# EAGLE board 48x_49x Breakout Board RevB (EAGLE 8.3.1)
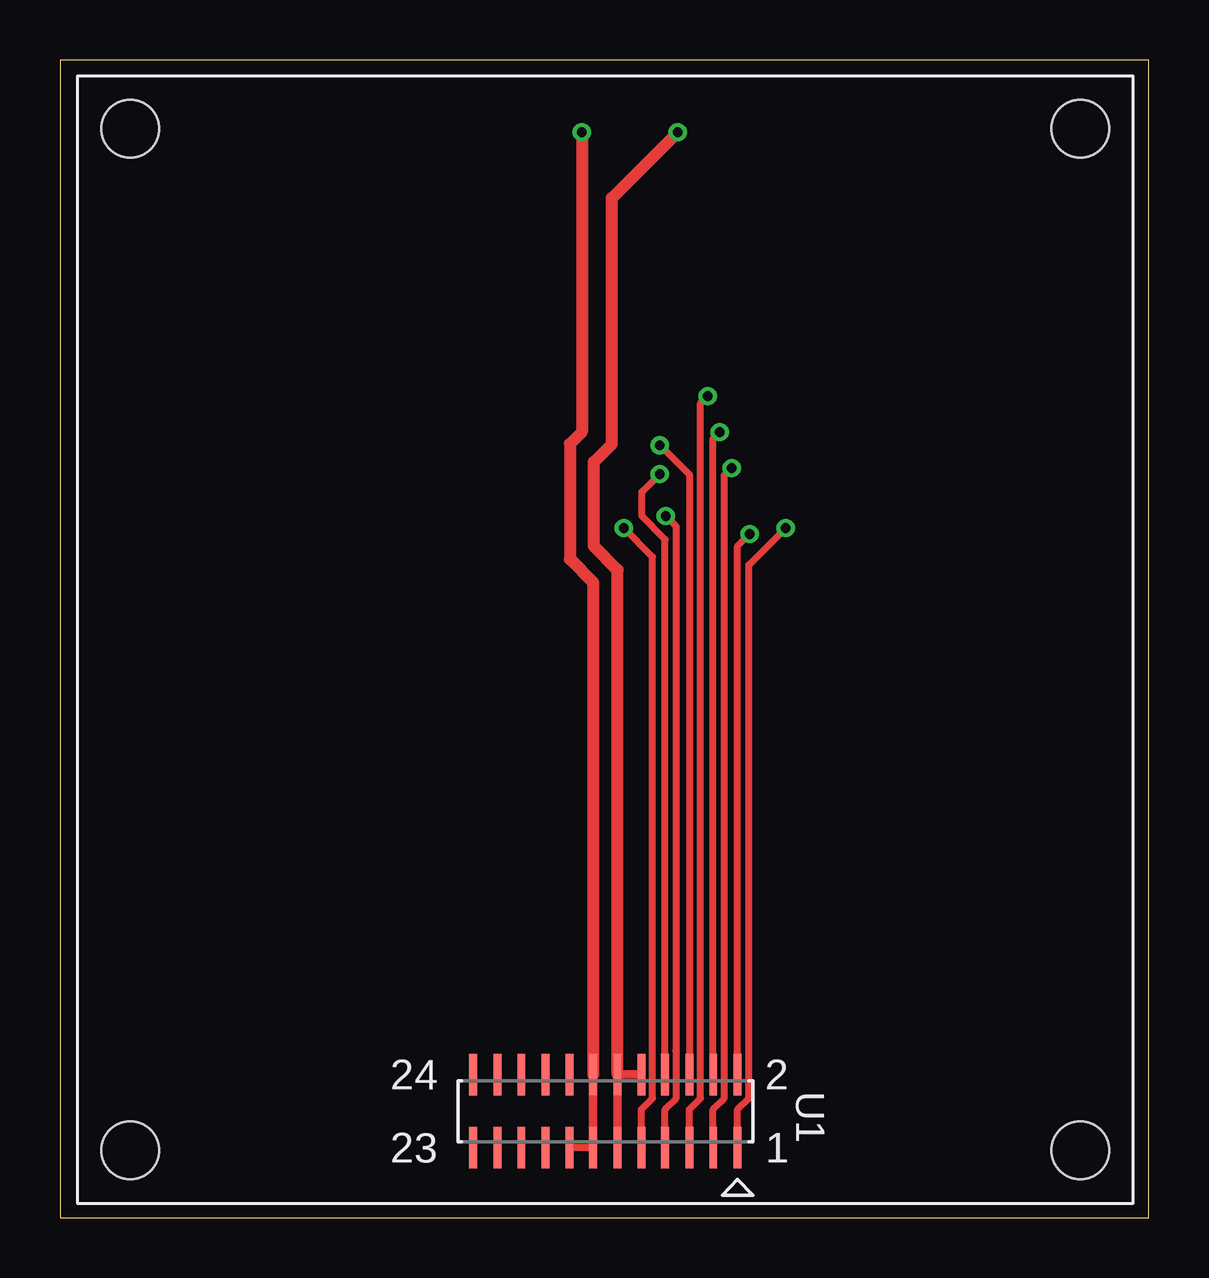
[diagram p0: board, top side]
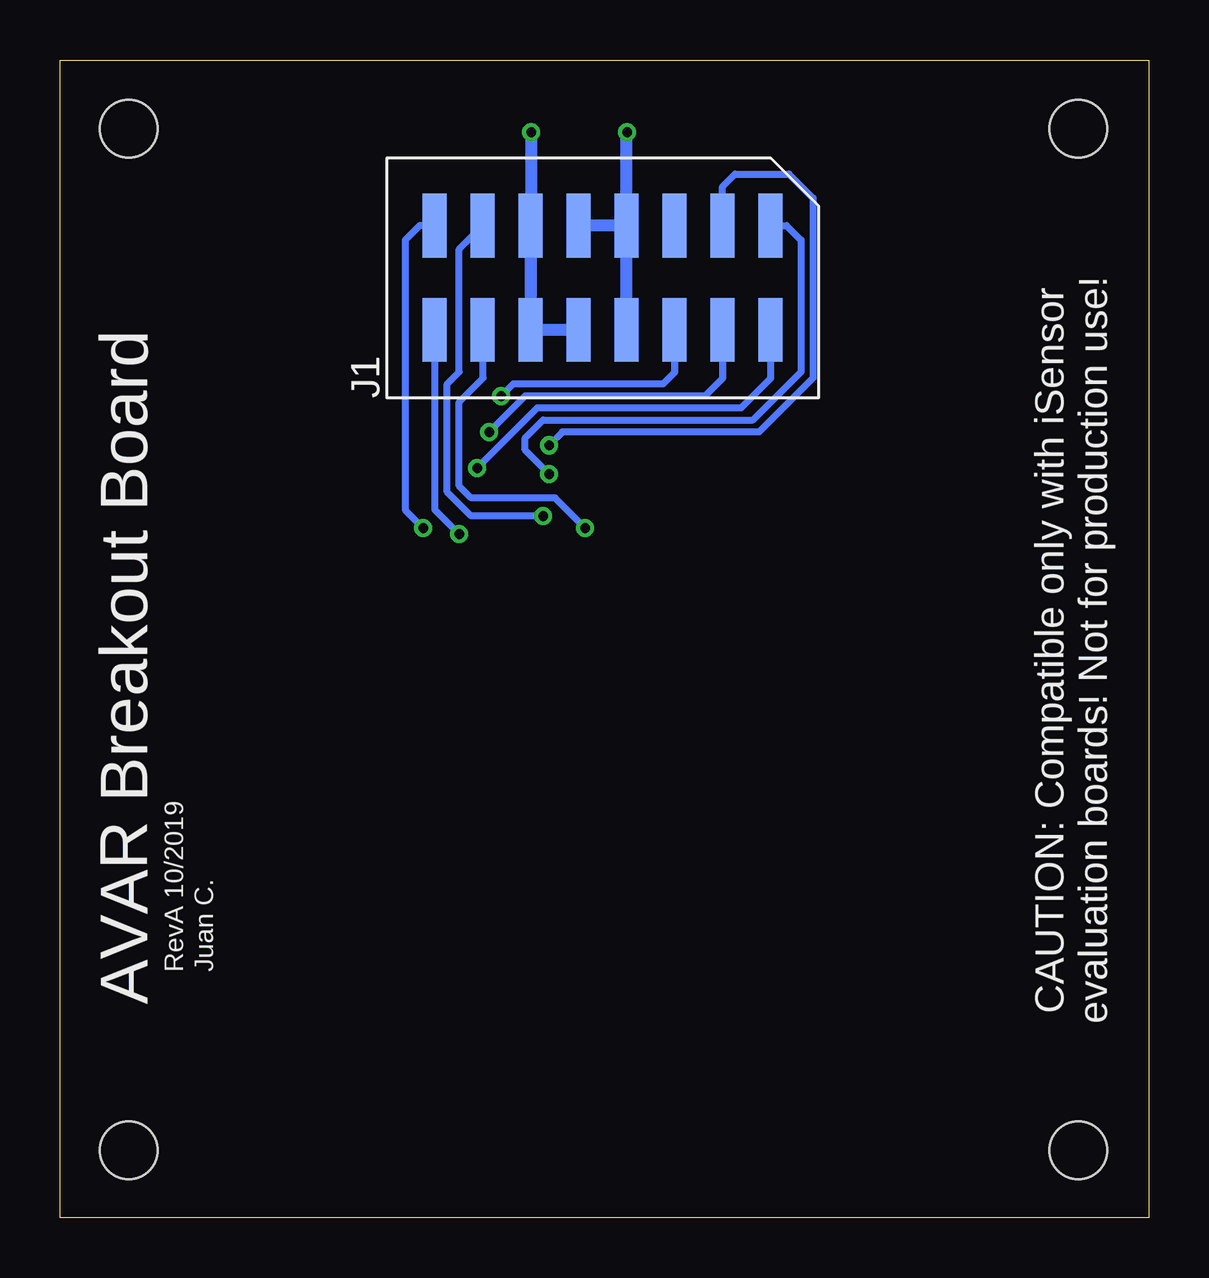
[diagram p1: board, bottom side, seen from below]

Size 45.39 x 48.26 mm. Coordinates in mm from the lower left corner, seen from the top.
Outline: 0,0 45.39,0 45.39,48.26 0,48.26 0,0
Copper layers (1*16): Top 0.0356mm / dielectric 1.5011mm / Bottom 0.0356mm
Design rules "LaenPCBOrder_FilledVias *": minimum track width 6mil, minimum drill 10mil, track to track 6mil, track to pad 6mil, pad to pad 6mil, via to via 6mil, smd to smd 6mil, copper to edge 15mil, drill to drill 6mil, minimum pad ring 7mil, minimum via ring 7mil, stop-mask expansion 4mil, vias tented up to drill 20mil, thermal gap 10mil

## Footprints (pad centres in the part's own frame; a part is rotated, then mirrored left to right if it is on the bottom)
A3-16PA-2SV(71)-TOP = smd 1 x 2.65: 1 -7,-2.225; 2 -7,2.125; 3 -5,-2.225; 4 -5,2.125; 5 -3,-2.225; 6 -3,2.125; 7 -1,-2.225; 8 -1,2.125; 9 1,-2.225; 10 1,2.125; 11 3,-2.225; 12 3,2.125; 13 5,-2.225; 14 5,2.125; 15 7,-2.225; 16 7,2.125
ADIS1648X = smd 0.33 x 1.727: 1 5.512,-1.524; 2 5.512,1.524; 3 4.496,-1.524; 4 4.496,1.524; 5 3.505,-1.524; 6 3.505,1.524; 7 2.489,-1.524; 8 2.489,1.524; 9 1.499,-1.524; 10 1.499,1.524; 11 0.508,-1.524; 12 0.508,1.524; 13 -0.508,-1.524; 14 -0.508,1.524; 15 -1.499,-1.524; 16 -1.499,1.524; 17 -2.489,-1.524; 18 -2.489,1.524; 19 -3.505,-1.524; 20 -3.505,1.524; 21 -4.496,-1.524; 22 -4.496,1.524; 23 -5.512,-1.524; 24 -5.512,1.524 | hole 2.4: -19.8,-1.642; 19.8,-1.642; 19.8,40.958; -19.8,40.958

## Placement (x,y rotation side)
J1  A3-16PA-2SV(71)T  [A3-16PA-2SV(71)-TOP]  22.77,39.13 180 bottom
U1  ADIS1648X  [ADIS1648X]  22.73,4.45 0 top

## Library data of the parts
J1 U1 = Analog Devices iSensors

## Nets
!CS: J1.3 U1.6
!RST: J1.1 U1.8
DIN: J1.6 U1.5
DIO1: J1.13 U1.7
DIO2: J1.14 U1.9
DIO3: J1.15 U1.1
DIO4: J1.16 U1.2
DOUT: J1.4 U1.4
GND: J1.7 J1.8 J1.9 U1.13 U1.14 U1.15
SCLK: J1.2 U1.3
VDD: J1.10 J1.11 J1.12 U1.10 U1.11 U1.12

## Tracks (layer width: path | path; a pad name or v marks a point on that pad's centre or on a via)
!CS  (via drill 0.4)
  Top 0.3: U1.6 26.24,6.49 26.25,6.5 26.25,30.95 v25,32.2
  Bottom 0.3: J1.3 17.77,42.98 17.25,43.5 15,43.5 14,42.5 14,35 16.25,32.75 24.45,32.75 v25,32.2
!RST  (via drill 0.4)
  Top 0.3: U1.8 25.22,28.28 24.25,29.25 24.25,30.25 v25,31
  Bottom 0.3: J1.1 15.11,41.35 14.5,40.75 14.5,35.25 16.5,33.25 25.25,33.25 26,32.5 26,32 v25,31
DIN  (via drill 0.4)
  Top 0.3: U1.5 26.24,4.51 26.71,4.98 26.71,33.96 v27,34.25
  Bottom 0.3: J1.6 19.77,35.23 20.25,34.75 26.5,34.75 v27,34.25
DIO1  (via drill 0.4)
  Top 0.3: 25.69,6.96 25.69,4.98 25.22,4.51 U1.7 | 25.69,6.96 25.68,6.97 | 25.69,6.96 25.69,28.81 v25.25,29.25
  Bottom 0.3: v25.25,29.25 28.25,29.25 29.25,30.25 29.25,34.75 28.75,35.25 28.75,40.37 J1.13
DIO2  (via drill 0.4)
  Top 0.3: U1.9 24.23,4.51 24.7,4.98 24.7,27.55 v23.5,28.75
  Bottom 0.3: v23.5,28.75 24.75,30 28.25,30 28.75,30.5 28.75,34 27.75,35 27.75,36.99 J1.14
DIO3  (via drill 0.4)
  Top 0.3: U1.1 28.25,4.51 28.71,4.98 28.71,27.21 v30.25,28.75
  Bottom 0.3: J1.15 30.39,41.35 31,40.75 31,29.5 v30.25,28.75
DIO4  (via drill 0.4)
  Top 0.3: U1.2 28.25,28 v28.75,28.5
  Bottom 0.3: J1.16 29.77,29.52 v28.75,28.5
DOUT  (via drill 0.4)
  Top 0.3: U1.4 27.23,32.48 v27.5,32.75
  Bottom 0.3: J1.4 17.77,34.98 18.5,34.25 26,34.25 v27.5,32.75
GND  (via drill 0.4)
  Top 0.3: U1.15 22.17,2.92 U1.13
  Top 0.35: U1.14 22.23,2.98 22.17,2.92
  Top 0.5: v21.75,45.25 21.75,32.75 21.25,32.25 21.25,27.45 22.23,26.48 U1.14
  Bottom 0.5: 21.95,41.35 J1.9 | 21.95,41.35 J1.7 21.77,45.23 v21.75,45.25 | J1.8 21.77,41.17 21.95,41.35
SCLK  (via drill 0.4)
  Top 0.3: U1.3 27.23,4.51 27.7,4.98 27.7,30.95 v28,31.25
  Bottom 0.3: J1.2 15.77,34.98 17,33.75 25.5,33.75 v28,31.25
VDD  (via drill 0.4)
  Top 0.3: U1.10
  Top 0.35: U1.11 U1.12 U1.10
  Top 0.5: U1.12 23.24,27.01 22.25,28 22.25,31.5 23,32.25 23,42.5 v25.75,45.25
  Bottom 0.5: J1.10 J1.12 J1.11 25.75,41.37 v25.75,45.25

## Text on the board
bNames: CAUTION: Compatible only with iSensor / evaluation boards! Not for production use! | AVAR Breakout Board | Juan C. | RevA 10/2019